# Altium PCB Smart_Car_Drv_V1.0.PcbDoc
Units mil, origin at the board's own origin, x right, y up, seen from the top; angles counter-clockwise.
Board outline 3921.26 x 2795.28 mil, 2 copper layers (Top Layer, Bottom Layer); 81 components, 42 nets, 246 pads, 83 vias.
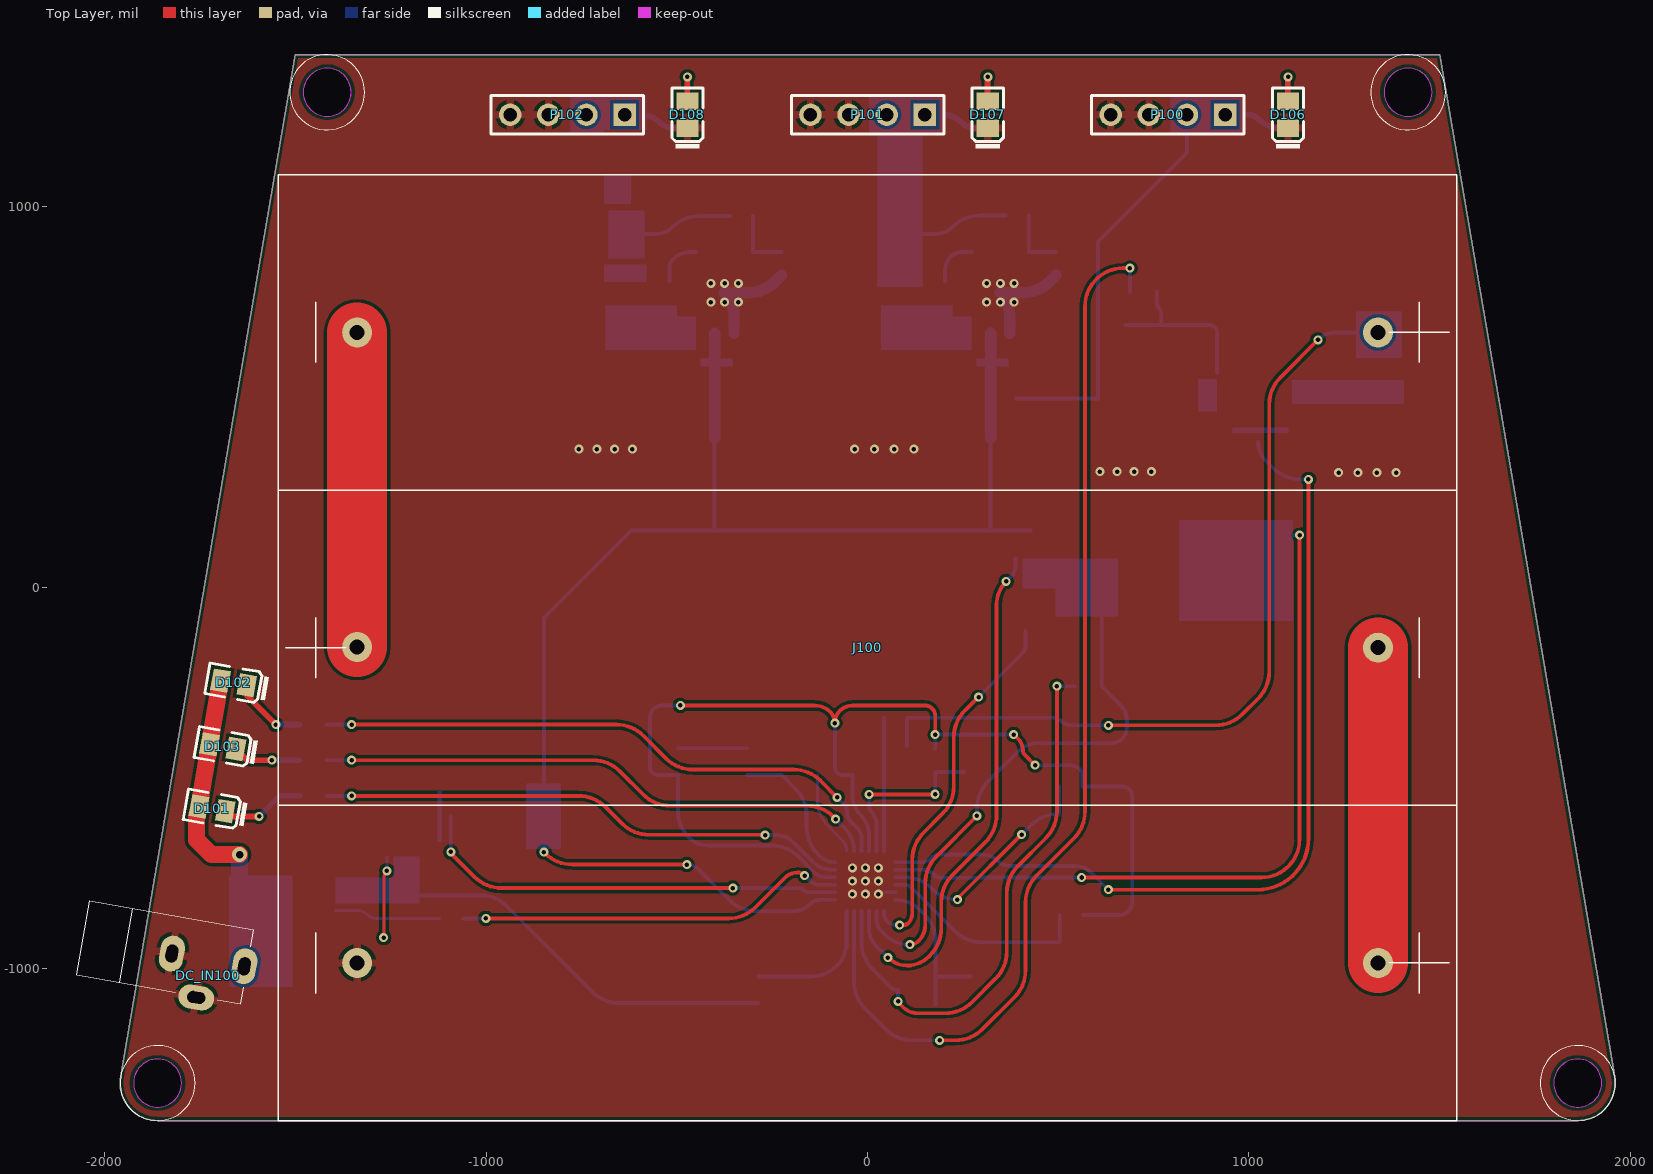
[diagram p0: Top Layer view]
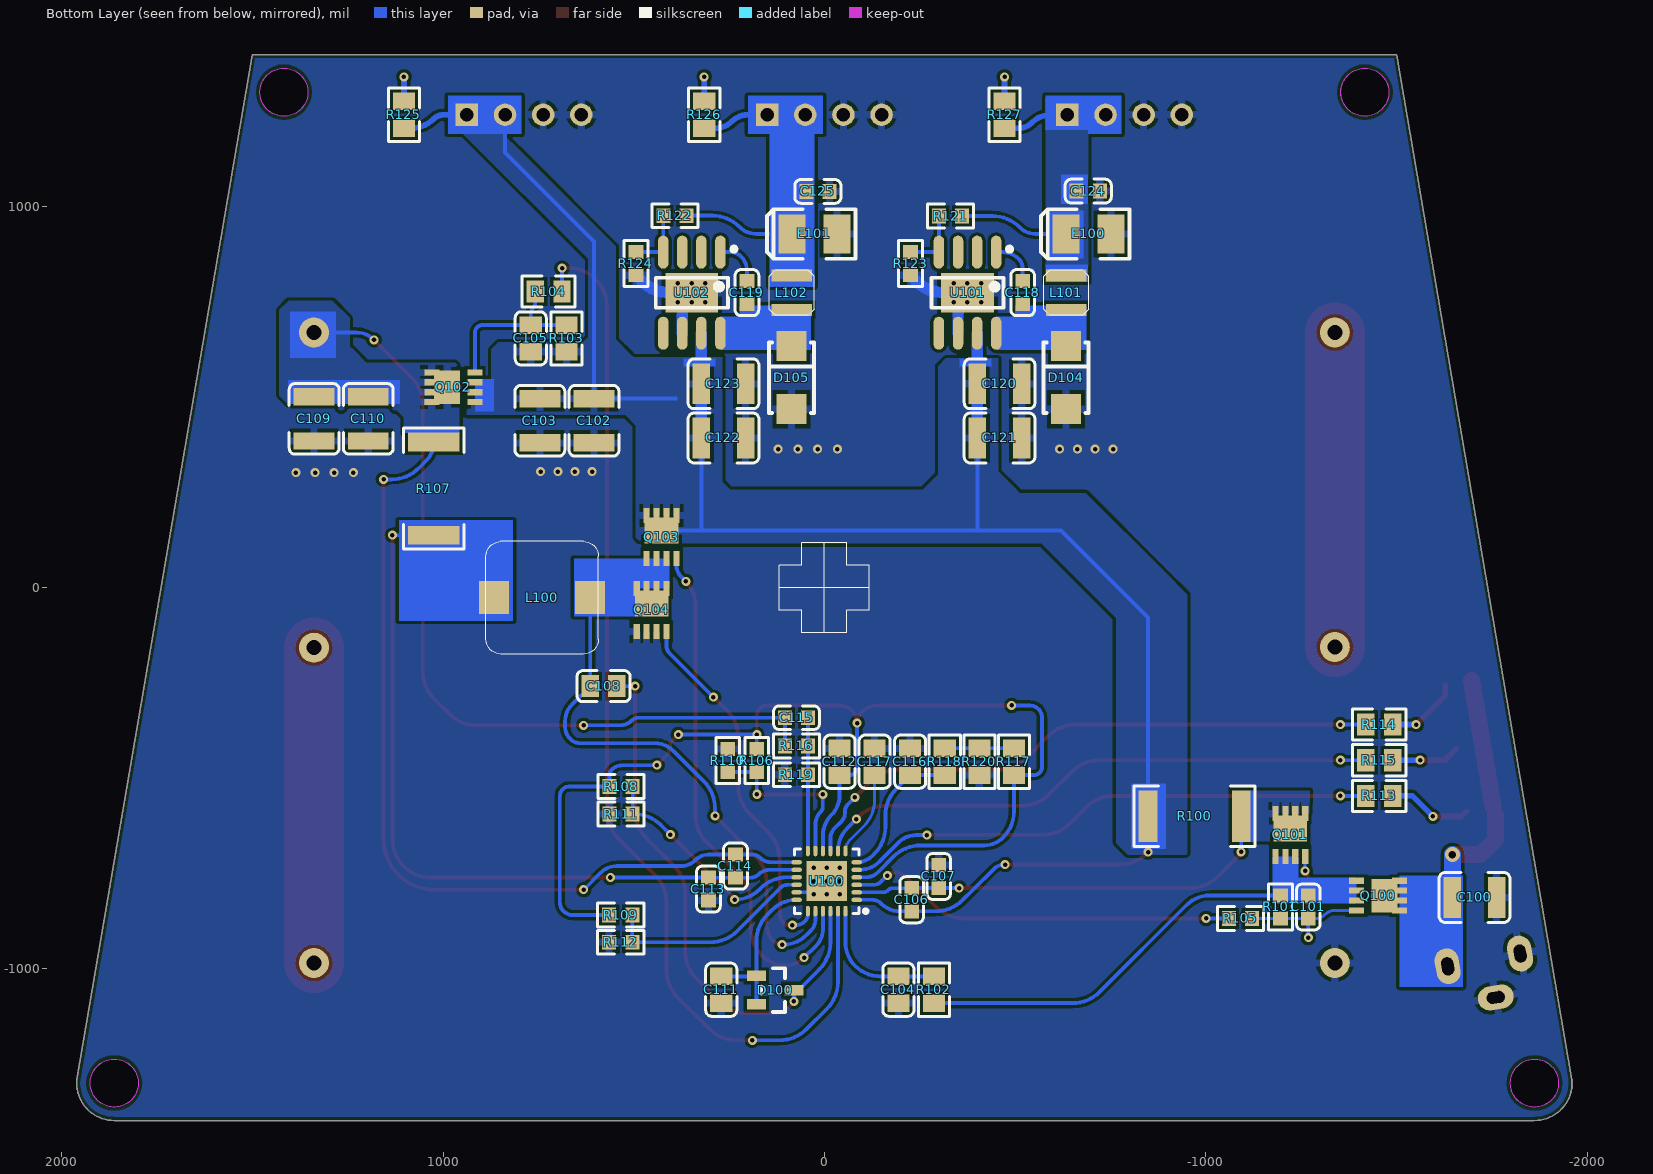
[diagram p1: Bottom Layer view, seen from below]
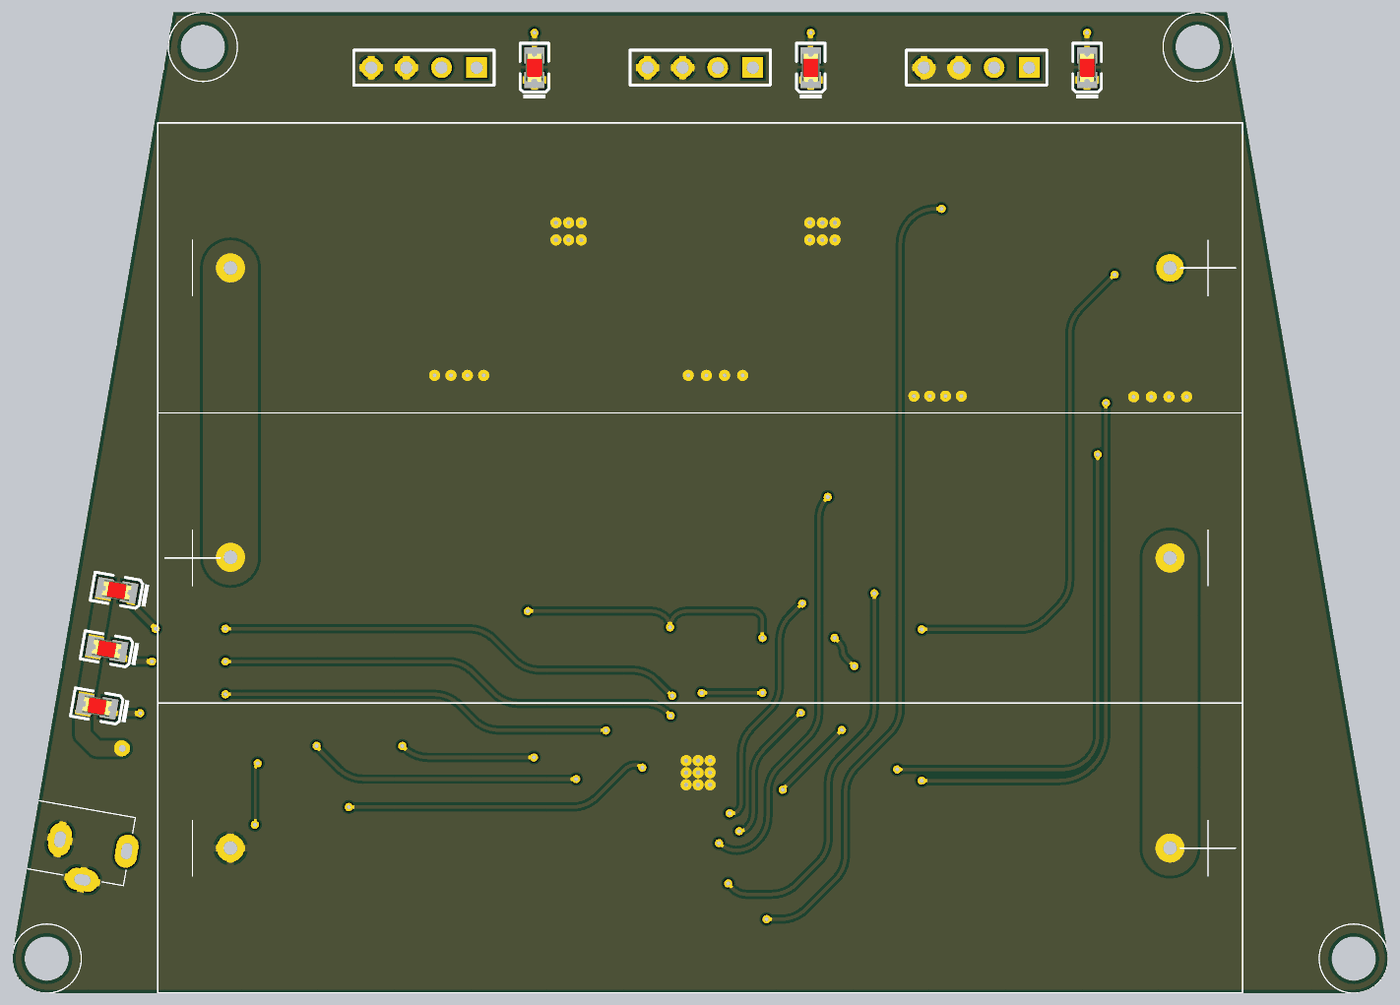
[diagram p2: 3D render of the assembled board from above, using the file's embedded part models]
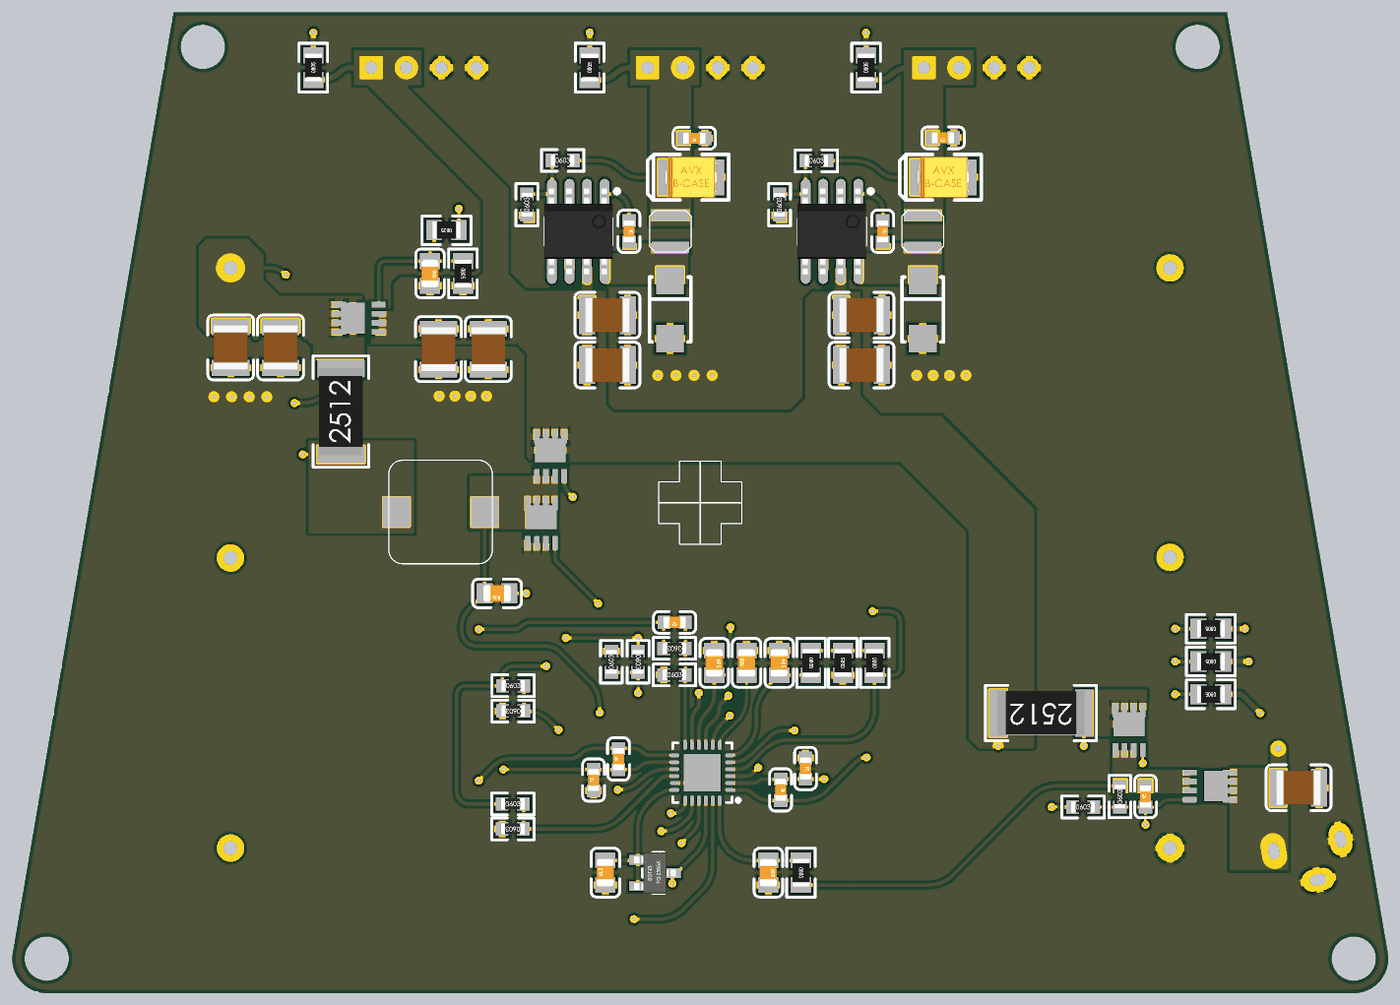
[diagram p3: 3D render of the assembled board from below, using the file's embedded part models]

## Layer stack, top to bottom
Top Solder: solder mask 0.4, Solder Resist, Dk 3.5
Top Layer: signal copper 1.4
Dielectric 1: dielectric 12.6, FR-4, Dk 4.8
Bottom Layer: signal copper 1.4
Bottom Solder: solder mask 0.4, Solder Resist, Dk 3.5

## Board outline
-1960.16,-1289.56 ccw(c-1862.2,-1299.21) -1862.2,-1397.64 1862.2,-1397.64 ccw(c1862.2,-1299.21) 1960.16,-1289.56 1960,-1289.58 1500.8,1397.62 1500.8,1397.64 -1500.97,1397.64 -1500.97,1397.63
cut-out: -1925.2,-1299.21 ccw(c-1862.2,-1299.21) -1862.2,-1362.2 ccw(c-1862.2,-1299.21) -1799.21,-1299.21 ccw(c-1862.2,-1299.21) -1862.2,-1236.22 ccw(c-1862.2,-1299.21)
cut-out: 1799.21,-1299.21 ccw(c1862.2,-1299.21) 1862.2,-1362.2 ccw(c1862.2,-1299.21) 1925.2,-1299.21 ccw(c1862.2,-1299.21) 1862.2,-1236.22 ccw(c1862.2,-1299.21)
cut-out: 1354.33,1299.21 ccw(c1417.32,1299.21) 1417.32,1236.22 ccw(c1417.32,1299.21) 1480.31,1299.21 ccw(c1417.32,1299.21) 1417.32,1362.2 ccw(c1417.32,1299.21)
cut-out: -1480.31,1299.21 ccw(c-1417.32,1299.21) -1417.32,1236.22 ccw(c-1417.32,1299.21) -1354.33,1299.21 ccw(c-1417.32,1299.21) -1417.32,1362.2 ccw(c-1417.32,1299.21)

## Design rules (kind name [scope] priority, off if disabled: settings)
Clearance GND [InNet('GND')] p1: gap=8
Clearance DVDD_3V3 [InNet('DVDD_3V3')] p2: gap=6
Clearance [All] p3: gap=6
ComponentClearance [All] p1: gap=0 collisioncheckmode=3 verticalgap=0 showdistances=FALSE
DiffPairsRouting [All] p1: maxlimit=10 minlimit=6 mostfreqgap=6 toplayer_minwidth=6 toplayer_maxwidth=15 toplayer_prefwidth=10 bottomlayer_minwidth=6 bottomlayer_maxwidth=15 bottomlayer_prefwidth=10 maxuncoupledlength=500
HoleSize [All] p1: absolutevalues=TRUE maxlimit=1000 minlimit=1 maxpercent=80.000 minpercent=20.000
HoleToHoleClearance [All] p1: gap=8 allowstackedmicrovias=TRUE
MinimumSolderMaskSliver [All] p1: minsoldermaskwidth=0
PlaneConnect [All] p1: planeconnectstyle=Relief reliefexpansion=20 reliefentries=4 reliefconductorwidth=15 reliefairgap=10
PolygonConnect via [Isvia] p1: connectstyle=Direct reliefconductorwidth=10 reliefentries=4 polygonreliefangle="90 Angle" airgapwidth=10
PolygonConnect [All] p2: connectstyle=Relief reliefconductorwidth=20 reliefentries=4 polygonreliefangle="90 Angle" airgapwidth=10
RoutingVias [All] p1: holewidth=12 width=25 viastyle="Through Hole" minholewidth=1 minwidth=1 maxholewidth=100 maxwidth=100
SilkToSilkClearance [All] p1: silktosilkclearance=0
SilkToSolderMaskClearance [IsPad] p1: minsilkscreentomaskgap=0 clearancetoexposedcopper=TRUE
SolderMaskExpansion [All] p1: expansion=4
Width [All] p1: maxlimit=100 minlimit=8 preferedwidth=8
22 further rules are at their usual default settings.

## Components (designator, comment, footprint, x,y, rotation, side; value= is the part's Value field where it differs from the comment)
C100 "1210-10uF-50V" 1210_C -1705,-812.38 r180 bottom
C101 "100nF (104) 10% 50V" 0603_C -1269,-837.38 r90 bottom
C102 "1210-10uF-50V" 1210_C 604,437.62 r270 bottom
C103 "1210-10uF-50V" 1210_C 746,437.62 r270 bottom
C104 "1uF (105) 10% 50V" 0805_C -194,-1054.38 r270 bottom
C105 "100nF(104) 10% 50V" 0805_C 770,653.62 r270 bottom
C106 "100nF (104) 10% 50V" 0603_C -229,-818.38 r270 bottom
C107 "100nF (104) 10% 50V" 0603_C -300,-757.38 r270 bottom
C108 "100nF(104) 10% 50V" 0805_C 579,-258.38 r0 bottom
C109 "1210-10uF-50V" 1210_C 1338,442.62 r270 bottom
C110 "1210-10uF-50V" 1210_C 1196,442.62 r270 bottom
C111 "1uF (105) 10% 50V" 0805_C 270.35,-1054.38 r90 bottom
C112 "1uF (105) 10% 50V" 0805_C -40,-456.38 r270 bottom
C113 "100nF (104) 10% 50V" 0603_C 304,-790.38 r90 bottom
C114 "100nF (104) 10% 50V" 0603_C 233,-730.38 r90 bottom
C115 "22pF (220) 5% 50V" 0603_C 73,-341 r0 bottom
C116 "100nF(104) 10% 50V" 0805_C -225,-456.38 r270 bottom
C117 "0805-56nF-50V" 0805_C -132,-456.38 r90 bottom
C118 "10nF (103) 10% 50V" 0603_C -520,773.62 r270 bottom
C119 "10nF (103) 10% 50V" 0603_C 203,773.62 r270 bottom
C120 "1210-10uF-50V" 1210_C -459.5,534.55 r180 bottom
C121 "1210-10uF-50V" 1210_C -459.5,392.55 r180 bottom
C122 "1210-10uF-50V" 1210_C 264.5,392.55 r180 bottom
C123 "1210-10uF-50V" 1210_C 264.5,534.55 r180 bottom
C124 "100nF (104) 10% 50V" 0603_C -692,1040 r0 bottom
C125 "100nF (104) 10% 50V" 0603_C 17,1039 r0 bottom
D100 "BAV70 A4" SOT-23(SOT-23-3) 129,-1055.38 r0 bottom
D101 "红灯 0805" 0805_LED_S1 -1719.07,-579.89 r170 top
D102 "翠绿 0805" 0805_LED_S1 -1662.68,-249.89 r170 top
D103 "蓝灯 0805" 0805_LED_S1 -1691.22,-416.89 r170 top
D104 "SS3200" SMA(DO-214AC)_S1 -634,550.62 r270 bottom
D105 "SS3200" SMA(DO-214AC)_S1 86,550.62 r270 bottom
D106 "红灯 0805" 0805_LED_S1 1102.36,1240.16 r90 top
D107 "红灯 0805" 0805_LED_S1 314.96,1240.16 r90 top
D108 "红灯 0805" 0805_LED_S1 -472.44,1240.16 r90 top
DC_IN100 "POWER" DC002 -1634.48,-993.01 r350 top locked
E100 "3528-100uF-16V" ES_3528 -693,927.62 r180 bottom
E101 "3528-100uF-16V" ES_3528 26,927.62 r180 bottom
J100 "18650X3" 18650X3 0,-157.48 r90 top locked
L100 "SMDRI74 6.8uH" "L 7.5*7.5*4.5" 740,-26.38 r0 bottom
L101 "SWPA3015S220MT  22uH" "L 3.0*3.0*1.5" -634,773.62 r90 bottom
L102 "SWPA3015S220MT  22uH" "L 3.0*3.0*1.5" 85,773.62 r90 bottom
P100 "BAT_OUT" HDR1X4 937.4,1240.16 r180 top locked
P101 "5V_OUT" HDR1X4 150,1240.16 r180 top locked
P102 "3.3V_OUT" HDR1X4 -637.4,1240.16 r180 top locked
Q100 "SI7617DN" PAK-1212-8 -1452,-807.38 r180 bottom
Q101 "SI7617DN" PAK-1212-8 -1222,-648.38 r90 bottom
Q102 "SI7617DN" PAK-1212-8 973,525.62 r0 bottom
Q103 "SIS412DN" PAK-1212-8 427,132.62 r90 bottom
Q104 "SIS412DN" PAK-1212-8 453,-58.38 r90 bottom
R100 "2512-0.01Ω-1%" 2512_R -971,-599.38 r0 bottom
R101 "100KΩ (1003) ±1%" 0603_R -1196,-837.37 r90 bottom
R102 "10Ω (10R0) ±1%" 0805_R -287,-1054.38 r270 bottom
R103 "100KΩ (1003) ±1%" 0805_R 676,653.62 r270 bottom
R104 "1KΩ (1001) ±1%" 0805_R 723,776.62 r0 bottom
R105 "1KΩ (1001) ±1%" 0603_R -1091,-867.37 r180 bottom
R106 "100KΩ (1003) ±1%" 0603_R 177.25,-453.38 r270 bottom
R107 "2512-0.01Ω-1%" 2512_R 1024,259.62 r90 bottom
R108 "100KΩ (1003) ±1%" 0603_R 533,-521.63 r180 bottom
R109 "100KΩ (1003) ±1%" 0603_R 534,-858.63 r180 bottom
R110 "0603-22.1K-1%" 0603_R 253.25,-453.38 r90 bottom
R111 "0603-10K-1%" 0603_R 533,-593.63 r0 bottom
R112 "0603-32.4K-1%" 0603_R 534,-929.63 r0 bottom
R113 "10KΩ (1002) ±1%" 0805_R -1455,-546 r0 bottom
R114 "10KΩ (1002) ±1%" 0805_R -1455,-359 r0 bottom
R115 "10KΩ (1002) ±1%" 0805_R -1455,-452.5 r0 bottom
R116 "0603-500K-1%" 0603_R 73.46,-415.13 r0 bottom
R117 "10KΩ (1002) ±1%" 0805_R -497,-456.38 r90 bottom
R118 "100Ω (1000) ±1%" 0805_R -315.67,-456.38 r270 bottom
R119 "100KΩ (1003) ±1%" 0603_R 73.46,-490.63 r180 bottom
R120 "100KΩ (1003) ±1%" 0805_R -406.33,-456.38 r90 bottom
R121 "10KΩ (1002) ±1%" 0603_R -331,974.62 r180 bottom
R122 "10KΩ (1002) ±1%" 0603_R 392,975.62 r180 bottom
R123 "0603-5.76K-1%" 0603_R -226,849.62 r90 bottom
R124 "0603-3.24K-1%" 0603_R 494,849.62 r90 bottom
R125 "10KΩ (1002) ±1%" 0805_R 1102.36,1240.16 r90 bottom
R126 "1KΩ (1001) ±1%" 0805_R 314.96,1240.16 r90 bottom
R127 "1KΩ (1001) ±1%" 0805_R -472.44,1240.16 r90 bottom
U100 "BQ24610" QFN-24_4x4x05P -6,-769.38 r90 bottom
U101 "TPS5430DDAR" "SOP-8_150mil DCDC" -375.5,773.55 r0 bottom
U102 "TPS5430DDAR" "SOP-8_150mil DCDC" 347.5,773.55 r0 bottom

## Footprints (in the part's own frame and the unit in brackets; to place one, negate y for a bottom-side part, rotate by r counter-clockwise, add the part's x,y. Pads: shape width x height; smd on the part's side, far side on the other; paste and mask are expansions set on the pad)
0603_C [mm]
  rect 0.93x0.98 smd: 1(-0.77,0) 2(0.77,0)
  silkscreen extent -1.53,-0.79 1.54,0.79, body extent -0.8,-0.4 0.8,0.4, height 0.3
0603_R [mm]
  rect 0.93x0.98 smd: 1(-0.77,0) 2(0.77,0)
  silkscreen extent -1.53,-0.79 1.54,0.79, body extent -0.85,-0.4 0.85,0.4, height 0.56
0805_C [mm]
  rect 1.16x1.47 smd: 1(-0.89,0) 2(0.89,0)
  silkscreen extent -1.77,-1.04 1.77,1.04, body extent -1,-0.63 1,0.62, height 0.77
0805_LED_S1 [mm]
  rect 1.16x1.47 smd: A(0.89,0) K(-0.89,0)
  silkscreen extent -2.25,-1.04 1.77,1.03, body extent -1.01,-0.63 1.01,0.62, height 1.1
0805_R [mm]
  rect 1.16x1.47 smd: 1(-0.89,0) 2(0.89,0)
  silkscreen extent -1.77,-1.04 1.77,1.03, body extent -1,-0.63 1,0.62, height 0.49
1210_C [mm]
  rect 1.16x2.72 smd: 1(-1.475,0) 2(1.475,0)
  silkscreen extent -2.36,-1.66 2.35,1.66, body extent -1.6,-1.25 1.6,1.25, height 1.3
2512_R [mm]
  rect 1.25x3.42 smd: 1(-3.1,0) 2(3.1,0)
  silkscreen extent -4.03,-2.01 4.02,2.01, body extent -3.16,-1.6 3.16,1.6, height 0.62
18650X3 [mm]
  round 2 hole 1 mask+0.05: 1(-21,34) 2(-21,-34) 3(0,-34) 4(0.047,34) 5(21,34) 6(21,-34)
  Top Layer lines w4: 0.047,34 21,34 ; -21,-34 0,-34
  silkscreen extent -31.5,-39.25 31.5,39.25
DC002 [mm]
  oval 1.6x2.4 hole 0.8 slot 1.2 at 90 deg: 1(0,0) 2(-4.9,0)
  oval 2.4x1.6 hole 0.8 slot 1.2 at 0 deg: 3(-2.8,-2.6)
  silkscreen extent -10.9,-2.5 0.2,2.5
ES_3528 [mm]
  rect 1.8x2.6 smd: 1(-1.5,0) 2(1.5,0)
  silkscreen extent -3.16,-1.65 2.73,1.65, body extent -1.85,-1.47 1.85,1.46, height 2.03
HDR1X4 [mm] "Connector; Header; 4 Position"
  rect 1.5x1.5 hole 0.9: 1(0,0)
  round 1.5 hole 0.9: 2(2.54,0) 3(5.08,0) 4(7.62,0)
  silkscreen extent -1.27,-1.27 8.89,1.27
"L 3.0*3.0*1.5" [mm]
  rect 0.8x2.7 smd mask+0.05: 1(-1.15,0) 2(1.15,0)
  silkscreen extent -1.5,-1.5 1.5,1.5
"L 7.5*7.5*4.5" [mm]
  rect 2x2.2 smd mask+0.05: 1(-3.2,0) 2(3.2,0)
  silkscreen extent -3.75,-3.75 3.75,3.75
PAK-1212-8 [mm]
  rect 1x0.41 smd mask+0.05: 1(-1.435,-0.99) 2(-1.435,-0.33) 2(-1.435,0.33) 2(-1.435,0.99) 3(1.435,-0.99) 3(1.435,-0.33) 3(1.435,0.33) 3(1.435,0.99)
  rect 1.725x2.235 smd mask+0.05: 3(0.432,0)
QFN-24_4x4x05P [mm]
  rect 2.68x2.68 smd mask+0.051: 0(0,0)
  oval 0.28x0.7 smd mask+0.051: 1(-1.25,-2) 2(-0.75,-2) 3(-0.25,-2) 4(0.25,-2) 5(0.75,-2) 6(1.25,-2) 13(1.25,2) 14(0.75,2) 15(0.25,2) 16(-0.25,2) 17(-0.75,2) 18(-1.25,2)
  oval 0.7x0.28 smd mask+0.051: 7(2,-1.25) 8(2,-0.75) 9(2,-0.25) 10(2,0.25) 11(2,0.75) 12(2,1.25) 19(-2,1.25) 20(-2,0.75) 21(-2,0.25) 22(-2,-0.25) 23(-2,-0.75) 24(-2,-1.25)
  silkscreen extent -2.15,-2.72 2.15,2.15
SMA(DO-214AC)_S1 [mm]
  rect 2x2 smd: 1(2.1,0) 2(-2.1,0)
  silkscreen extent -2.35,-1.5 2.35,1.5
"SOP-8_150mil DCDC" [mm]
  rect 3.51x2.62 smd mask+0.05: 0(0,0)
  oval 0.7x2.2 smd: 1(-1.905,-2.7) 2(-0.635,-2.7) 3(0.635,-2.7) 4(1.905,-2.7) 5(1.905,2.7) 6(0.635,2.7) 7(-0.635,2.7) 8(-1.905,2.7)
  silkscreen extent -2.95,-3.05 2.4,1, body extent -2.5,-3.1 2.5,3.1, height 1.75
SOT-23(SOT-23-3) [mm]
  rect 1.25x0.7 smd: 1(1.25,-0.95) 2(1.25,0.95) 3(-1.25,0)
  silkscreen extent -0.65,-1.46 0.9,1.46, body extent -1.5,-1.5 1.5,1.5, height 1.3

## Part data
C100 C102 C103 C109 C110 C120 C121 C122 C123: library part "1210 10uF (106) 10% 50V", "贴片电容"
C101 C106 C107 C113 C114 C124 C125: library part "0603 100nF (104) 10% 50V", "贴片电容"
C104 C111 C112: library part "0805 1uF (105) 10% 50V", "贴片电容"
C105 C108 C116: library part "0805 100nF(104) 10% 50V", "贴片电容"
C115: library part "0603 22pF (220) 5% 50V", "贴片电容"
C117: library part "0805 100nF (104) 10% 50V", "贴片电容"
C118 C119: library part "0603 10nF (103) 10% 50V", "贴片电容"
D100: library part "SOT-23 BAV70 A4", "开关二极管"
D101 D106 D107 D108: library part "0805 红灯", "发光二极管"
D102: library part "0805 翠绿", "发光二极管"
D103: library part "0805 蓝灯", "发光二极管"
D104 D105: library part "SMA(DO-214AC) M7", "二极管"
DC_IN100: library part PWR
E100 E101: library part ES-3528, "贴片钽电容"
J100: "BAT_BASE"
L100 L101 L102: library part "10uH 20%", "贴片电感"
P100 P101 P102: library part "Header 4", "Header, 4-Pin"
Q100 Q101 Q102: "P-MOS"
Q103 Q104: "N-MOS"
R100 R107: library part "2512 10KΩ (103) 1%", "贴片电阻"
R101 R106 R108 R109 R119: library part "0603 100KΩ (1003) 1%", "贴片电阻"
R102: library part "0805 10Ω (10R0) 1%", "贴片电阻"
R103 R120: library part "0805 100KΩ (1003) 1%", "贴片电阻"
R104 R126 R127: library part "0805 1KΩ (1001) 1%", "贴片电阻"
R105: library part "0603 1KΩ (1001) 1%", "贴片电阻"
R110 R111 R112 R116 R123 R124: library part "0603 10KΩ (103) 1%", "贴片电阻"
R113 R114 R115 R117 R125: library part "0805 10KΩ (1002) 1%", "贴片电阻"
R118: library part "0805 100Ω (1000) 1%", "贴片电阻"
R121 R122: library part "0603 10KΩ (1002) 1%", "贴片电阻"
U100: "Charg IC"
U101 U102: "DC-DCоƬ"

## Via types
v1: diameter 23.62, hole 11.81, Top Layer to Bottom Layer, 82 vias
v2: diameter 39.37, hole 19.68, Top Layer to Bottom Layer, 1 vias

## Nets (pads, with @x,y where several pads share a name; then routed paths per layer and width w, separated by ;. In a path a pad name is that pad's centre, name@x,y a point inside that pad or via, vN(x,y) a via of type N, cw(c..) or ccw(c..) an arc to the next point about the centre after c; other vN are vias at no path point)
DVDD_3V3: C124.2 E100.1 L101.2 P102.1 P102.2 R121.2 R127.1 | length 459.5
  Bottom Layer w10: E100.1 -554.42,927.62 ccw(c-554.42,988.09) -511.67,945.33 cw(c-440.96,874.62) -440.96,974.62 R121.2
  Bottom Layer w15: P102.1 -593.66,1240.16 cw(c-593.66,1171.34) -545,1220 ccw(c-509.07,1255.93) -509.07,1205.12 R127.1
DVDD_5V: C125.2 E101.1 L102.2 P101.1 P101.2 R122.2 R126.1 | length 463.8
  Bottom Layer w10: E101.1 177.22,927.62 ccw(c177.22,993.78) 224,947 cw(c293.1,877.9) 293.1,975.62 R122.2
  Bottom Layer w15: P101.1 200.58,1240.16 cw(c200.58,1181.58) 242,1223 ccw(c285.17,1266.17) 285.17,1205.12 R126.1
DVDD_24V: C100.1 D101.A D102.A D103.A DC_IN100.1 Q100.3 | length 639.3
  Top Layer w45: D101.A@-1760,-598 -1760,-661 -1720.93,-700.07 v2(-1646.93,-700.07) ; D101.A D103.A D102.A
  Bottom Layer w45: C100.1 v2(-1646.93,-700.07)
GND: C100.2 C102.2 C103.2 C104.2 C107.1 C109.2 C110.2 C111.1 C112.1 C113.1 C116.1 C117.2 C120.2 C121.2 C122.2 C123.2 C124.1 C125.1 D104.1 D105.1 D106.K D107.K D108.K DC_IN100.2 DC_IN100.3 E100.2 E101.2 J100.1 P100.3 P100.4 P101.3 P101.4 P102.3 P102.4 Q104.2 R110.2 R111.2 R112.2 R119.1 R120.1 R123.1 R124.1 U100.0 U100.17 U101.0 U101.6 U102.0 U102.6 | length 579
  Bottom Layer w10: U100.0@45,-798.91 U100.17
  Bottom Layer w30: U101.6 -350.5,713.2 ccw(c-435.86,713.2) U101.0 -313.18,773.55 ccw(c-313.18,873.55) -242.47,802.84 R123.1 ; U102.6 372.5,713.2 ccw(c287.14,713.2) U102.0 406.82,773.55 ccw(c406.82,873.55) 477.53,802.84 R124.1
  other v1: -40,-803.88 -6,-803.88 28,-803.88 -40,-769.38 -6,-769.38 28,-769.38 -40,-734.88 -6,-734.88 28,-734.88 1235,302 1285.33,302 1335.67,302 1386,302 609,304 654,304 699,304 744,304 -757,363 -710.33,363 -663.67,363 -617,363 -34,363 17.67,363 69.33,363 121,363 -411,749 -375,749 -339,749 312,749 348,749 384,749 -411,798 -375,798 -339,798 312,798 348,798 384,798
NetC101_1: C101.1 Q100.1 Q101.1 R101.1 R105.2 | length 549.1
  Top Layer w8: v1(-1269,-917.59) ccw(c-1265.59,-917.59) -1268,-920 -1268,-759.28 cw(c-1244.1,-759.28) v1(-1261,-742.38)
  Bottom Layer w8: Q100.1 -1338.7,-846.35 cw(c-1338.7,-882.7) -1313,-857 ccw(c-1287.18,-831.18) -1287.18,-867.69 C101.1 ; v1(-1269,-917.59) C101.1 ; v1@-1260.98,-742.35 Q101.1 ; R105.2@-1121.63,-867.69 C101.1
NetC101_2: C101.2 Q100.2 Q101.2 R101.2 R102.2 | length 1017.8
  Bottom Layer w10: R101.2 -1011.63,-807.06 cw(c-1011.63,-895.63) -949,-833 -721.87,-1060.13 ccw(c-651.16,-989.42) -651.16,-1089.42 R102.2
NetC104_1: C104.1 R102.1 U100.24 | length 364.1
  Bottom Layer w10: R102.1 C104.1 -147,-1019.34 ccw(c-147,-926) -81,-992 ccw(c-143.26,-929.74) -55.21,-929.74 U100.24
NetC105_1: C105.1 Q102.1 R103.1 R104.2 | length 447.1
  Bottom Layer w10: R103.1 C105.1 ; R104.2 758.04,747.05 ccw(c776.1,747.05) 763.33,734.28 cw(c747.22,718.18) 767.45,728.65 cw(c747.22,718.18) 770,718.18 C105.1 ; Q102.1 916.5,668.5 ccw(c896.34,668.5) 896.34,688.66 C105.1
NetC106_1: C106.1 C107.2 Q101.3 R100.1 U100.2 | length 1140.8
  Top Layer w10: v1(-1093.05,-693.06) ccw(c-1086.06,-693.06) -1091,-698 -1030.6,-758.4 ccw(c-959.89,-687.69) -959.89,-787.69 v1(-353.69,-787.69)
  Bottom Layer w10: v1(-1093.05,-693.06) R100.1 ; v1(-353.69,-787.69) C107.2 C106.1@-229.37,-787.69 ; C106.1 -178.5,-788.06 cw(c-178.5,-801.5) -169,-792 ccw(c-152.33,-775.33) -152.33,-798.91 U100.2
NetC108_1: C108.1 D100.3 U100.22 | length 1447.1
  Top Layer w10: v1(79.79,-1085.07) ccw(c83.93,-1085.07) 81,-1088 93.45,-1100.45 ccw(c131,-1062.89) 131,-1116 203.58,-1116 ccw(c203.58,-1016) 274.29,-1086.71 335.71,-1025.29 ccw(c265,-954.58) 365,-954.58 365,-800.42 cw(c465,-800.42) 394.29,-729.71 466.87,-657.13 ccw(c396.16,-586.42) 496.16,-586.42 v1(496.16,-258.38)
  Bottom Layer w10: U100.22 -15.84,-930.74 ccw(c84.16,-930.74) 13.45,-1001.45 58.6,-1046.6 ccw(c79.79,-1025.42) D100.3 v1(79.79,-1085.07) ; v1(496.16,-258.38) C108.1
NetC108_2: C108.2 L100.1 Q103.2 Q104.3 U100.20 | length 1442.4
  Top Layer w10: v1(111,-936) ccw(c111,-904.62) 133.19,-926.81 ccw(c90.2,-883.82) 151,-883.82 151,-775.42 cw(c251,-775.42) 180.29,-704.71 v1(286.71,-598.29)
  Bottom Layer w10: U100.20 23.53,-871.3 ccw(c62.7,-871.3) 35,-899 47.25,-911.25 ccw(c107,-851.5) 107,-936 v1(111,-936) ; v1(286.71,-598.29) 286.71,-578.71 cw(c386.71,-578.71) 316,-508 396,-428 cw(c444.28,-476.28) 444.28,-408 639.67,-408 ccw(c639.67,-370.37) 666.28,-396.98 ccw(c633.15,-363.85) 680,-363.85 680,-352 ccw(c613.22,-352) 660.44,-304.78 C108.2 cw(c583.66,-258.38) 614.02,-259.58 L100.1
NetC111_2: C111.2 D100.1 D100.2 U100.18 | length 424.4
  Bottom Layer w10: U100.18 73.24,-818.59 cw(c73.24,-908.76) 94.98,-821.25 cw(c73.24,-908.76) 137,-845 148.92,-856.92 cw(c78.21,-927.63) 178.21,-927.63 D100.1 ; D100.2 D100.1 ; C111.2 181.5,-1019.34 cw(c181.5,-1014.69) D100.1
NetC113_2: C113.2 C114.1 L100.2 R107.1 U100.14 | length 2031.1
  Top Layer w10: v1(561,-760.06) 1032.57,-760.06 ccw(c1032.57,-660.06) 1132.57,-660.06 v1(1132.57,137.57) ccw(c1132.57,139) v1@1134,139
  Bottom Layer w10: U100.14 142.25,-739.85 cw(c142.25,-784.75) 174,-753 ccw(c192.57,-734.43) 192.57,-760.69 C114.1 302.48,-760.69 ccw(c302.48,-758.54) C113.2 v1(561,-760.06) ; R107.1 v1(1132.57,137.57)
NetC115_1: C115.1 R116.1 R119.2 U100.12 | length 349.8
  Bottom Layer w10: C115.1 42.69,-489.51 ccw(c44.27,-489.51) R119.2 43.15,-690.57 U100.12
NetC116_2: C116.2 R118.2 U100.6 | length 380.5
  Bottom Layer w10: R118.2 C116.2 -189.29,-527.13 cw(c-260,-597.84) -160,-597.84 -160,-627.58 ccw(c-60,-627.58) -130.71,-698.29 -125.87,-703.13 ccw(c-84.74,-662) U100.6
NetC117_1: C117.1 U100.7 | length 225
  Bottom Layer w8: C117.1 -132,-555.58 ccw(c-32,-555.58) -102.71,-626.29 -67.13,-661.87 cw(c-95.89,-690.64) U100.7
NetC118_1: C118.1 U101.1 | length 125
  Bottom Layer w10: C118.1 -520,837.86 cw(c-485.86,837.86) -510,862 cw(c-466.91,818.91) -466.91,879.85 U101.1
NetC118_2: C118.2 D104.2 L101.1 U101.8
NetC119_1: C119.1 U102.1 | length 125.7
  Bottom Layer w10: C119.1 203,831.79 cw(c254.21,831.79) 218,868 cw(c246.61,839.39) 246.61,879.85 U102.1
NetC119_2: C119.2 D105.2 L102.1 U102.8
NetD101_K: D101.K R113.1 | length 222.7
  Top Layer w15: D101.K -1670.54,-600 v1(-1596,-600)
  Bottom Layer w15: v1(-1596,-600) -1542,-546 R113.1
NetD102_K: D102.K R114.1 | length 196.5
  Top Layer w15: D102.K -1628.18,-282.82 v1(-1552,-359)
  Bottom Layer w15: v1(-1552,-359) R114.1
NetD103_K: D103.K R115.1 | length 178.9
  Top Layer w15: D103.K -1627.19,-452.5 v1(-1562.5,-452.5)
  Bottom Layer w15: v1(-1562.5,-452.5) R115.1
NetD106_A: D106.A R125.2 | length 128.9
  Top Layer w15: D106.A@1101.8,1276.55 v1@1101.8,1341
  Bottom Layer w15: R125.2 v1(1102.36,1339.65)
NetD107_A: D107.A R126.2 | length 128.9
  Top Layer w15: D107.A@314.4,1276.55 v1@314.4,1341
  Bottom Layer w15: R126.2 v1(314.96,1339.65)
NetD108_A: D108.A R127.2 | length 131.9
  Top Layer w15: D108.A cw(c-471.09,1276.55) -473,1276.55 -473,1341 cw(c-474.35,1339.65) v1(-472.44,1339.65)
  Bottom Layer w15: R127.2 v1(-472.44,1339.65)
NetQ103_1: Q103.1 U100.21 | length 1378.4
  Top Layer w10: v1(53.29,-970.29) ccw(c55,-968.59) 55,-971 ccw(c103.28,-922.72) 103.28,-991 ccw(c103.28,-909.6) 160.84,-967.16 163.71,-964.29 ccw(c93,-893.58) 193,-893.58 193,-824.42 cw(c293,-824.42) 222.29,-753.71 308.71,-667.29 ccw(c238,-596.58) 338,-596.58 338,-44.94 cw(c424.77,-44.94) 353.35,4.34 cw(c424.77,-44.94) v1(363.41,16.41)
  Bottom Layer w10: U100.21 3.84,-896.58 ccw(c62.42,-896.58) 21,-938 v1(53.29,-970.29) ; v1(363.41,16.41) 375,28 ccw(c343.56,59.44) 388.02,59.44 Q103.1
NetQ104_1: Q104.1 U100.19 | length 983.6
  Top Layer w10: v1(83.59,-885) v1@88.86,-885 ; v1(290.71,-287.29) cw(c289,-285.59) 289,-288 255.29,-321.71 ccw(c326,-392.42) 226,-392.42 226,-521.58 cw(c126,-521.58) 196.71,-592.29 146.29,-642.71 ccw(c217,-713.42) 117,-713.42 117,-853.71 cw(c79.22,-853.71) 105.93,-880.42 ; v1@88.86,-885 ccw(c88.86,-850.86) 105.93,-880.42 ; v1@88.86,-885 94.88,-885 ccw(c94.88,-869.37) 105.93,-880.42
  Bottom Layer w10: U100.19 43.21,-856.2 ccw(c69.8,-856.2) 51,-875 ccw(c75.14,-850.86) 75.14,-885 v1(83.59,-885) ; v1(290.71,-287.29) 406,-172 ccw(c386.63,-152.63) 414.02,-152.63 Q104.1
NetR104_1: R104.1 U100.23 | length 2840
  Top Layer w10: v1(189,-1187) 230.58,-1187 ccw(c230.58,-1087) 301.29,-1157.71 384.71,-1074.29 ccw(c314,-1003.58) 414,-1003.58 414,-825.42 cw(c514,-825.42) 443.29,-754.71 540.71,-657.29 ccw(c470,-586.58) 570,-586.58 570,737.96 cw(c670,737.96) 670,837.96 v1(687.96,837.96)
  Bottom Layer w10: U100.23 -35.53,-1034.05 ccw(c64.47,-1034.05) -6.24,-1104.76 46.71,-1157.71 ccw(c117.42,-1087) 117.42,-1187 v1(189,-1187) ; R104.1 v1(687.96,837.96)
NetR105_1: R105.1 U100.3 | length 1030.6
  Top Layer w10: v1(-1001.37,-867.37) -364.8,-867.37 ccw(c-364.8,-767.37) -294.09,-838.09 -216,-760 cw(c-184.62,-791.38) -184.62,-747 -184.24,-747 cw(c-184.24,-772.5) -166.21,-754.47 cw(c-166.21,-756.1) v1(-165.05,-754.95)
  Bottom Layer w10: R105.1 v1(-1001.37,-867.37) ; v1(-165.05,-754.95) -149,-771 ccw(c-129.15,-751.15) -129.15,-779.22 U100.3
NetR106_2: R106.2 R110.1 U100.11 | length 461.3
  Top Layer w10: v1(4,-542) 177,-542 v1(177.25,-541.75)
  Bottom Layer w10: v1(4,-542) 4,-574.93 ccw(c21.07,-574.93) 9,-587 cw(c-26.07,-622.07) 23.53,-622.07 U100.11 ; v1(177.25,-541.75) R106.2 R110.1
NetR108_2: R108.2 R111.1 U100.15 | length 607.5
  Top Layer w10: v1(235,-818) cw(c239.83,-818) 236.41,-814.59 v1(403.46,-647.54)
  Bottom Layer w10: U100.15 97.11,-759.54 cw(c97.11,-859.54) 167.82,-788.82 170.13,-791.13 ccw(c235,-726.26) v1(235,-818) ; v1(403.46,-647.54) 428.08,-622.92 cw(c498.79,-693.63) 498.79,-593.63 R111.1 R108.2
NetR109_2: R109.2 R112.1 U100.16 | length 558.9
  Bottom Layer w10: U100.16 96.93,-779.22 cw(c96.93,-804.07) 114.48,-786.48 228.34,-900.34 ccw(c299.05,-829.63) 298.91,-929.63 ccw(c299.05,-829.63) 299.05,-929.63 R112.1 R109.2
NetR113_2: R113.2 U100.5 | length 1400.9
  Top Layer w10: v1(-1353.17,-546) -758.42,-546 cw(c-758.42,-646) -687.71,-575.29 -644.29,-618.71 ccw(c-573.58,-548) -573.58,-648 -271,-648 ccw(c-268.59,-645.59) v1(-268.59,-649)
  Bottom Layer w10: R113.2 v1(-1353.17,-546) ; v1(-268.59,-649) -240,-649 cw(c-240,-711.77) -195.62,-667.38 -145,-718 ccw(c-92.25,-665.25) -92.25,-739.85 U100.5
NetR114_2: R114.2 U100.9 | length 1569.5
  Top Layer w10: v1(-1353.17,-359) -658.83,-359 cw(c-658.83,-459) -588.12,-388.29 -528.7,-447.71 ccw(c-457.99,-377) -457.99,-477 -194.42,-477 cw(c-194.42,-577) -123.71,-506.29 v1(-80,-550)
  Bottom Layer w10: R114.2 v1(-1353.17,-359) ; v1(-80,-550) -59.99,-570.01 cw(c-63.23,-573.24) -58.65,-573.24 cw(c-69.89,-584.48) -54,-584.48 -54,-591 ccw(c-22.62,-591) -44.81,-613.19 -27,-631 cw(c-53.94,-657.94) -15.84,-657.94 U100.9
NetR115_2: R115.2 U100.8 | length 1487.6
  Top Layer w10: v1(-1353.17,-452.5) -719.92,-452.5 cw(c-719.92,-552.5) -649.21,-481.79 -588.29,-542.71 ccw(c-517.58,-472) -517.58,-572 -159.42,-572 cw(c-159.42,-672) -88.71,-601.29 -85,-605 ccw(c-82.59,-605) v1(-84.29,-606.71)
  Bottom Layer w10: R115.2 v1(-1353.17,-452.5) ; v1(-84.29,-606.71) -60.39,-630.61 cw(c-120.42,-690.64) U100.8
NetR117_2: R117.2 R118.1 R120.2 | length 181.3
  Bottom Layer w10: R117.2 R120.2 R118.1
NetR121_1: R121.1 R123.2 U101.4 | length 169.2
  Bottom Layer w10: R121.1 -300.69,880.04 R123.2@-226.1,880.04
NetR122_1: R122.1 R124.2 U102.4 | length 167.3
  Bottom Layer w10: R122.1 422.31,880.04 U102.4 R124.2@493.91,879.85
VBAT: C109.1 C110.1 C114.2 C115.2 J100.6 Q102.3 R107.2 R116.2 U100.13 | length 4505.7
  Top Layer w10: v1(631,-792) 1022.86,-792 ccw(c1022.86,-658.86) 1156,-658.86 v1(1156,284) ; v1(631,-361) 912.58,-361 ccw(c912.58,-261) 983.29,-331.71 1023.71,-291.29 ccw(c953,-220.58) 1053,-220.58 1053,480.58 cw(c1153,480.58) 1082.29,551.29 v1(1181,650)
  Bottom Layer w10: U100.13 139.63,-720.17 ccw(c139.63,-678.63) 169,-708 cw(c188.16,-727.16) 188.16,-700.06 C114.2 302.94,-700.06 cw(c302.94,-751.06) 339,-715 ccw(c375.21,-678.79) 375.21,-730 544,-730 cw(c544,-790.36) 586.68,-747.68 v1(631,-792) ; R116.2 cw(c104.9,-414.01) 103.32,-414.01 C115.2 486.69,-341 cw(c486.69,-368.31) 506,-349 ccw(c534.97,-320.03) 534.97,-361 v1(631,-361) ; R107.2 ccw(c1093.21,381.67) 1044.27,332.73 1063.71,313.29 ccw(c1134.42,384) 1134.42,284 v1(1156,284) ; v1(1181,650) cw(c1227.57,603.43) 1227.57,669.29 J100.6
VBAT_OUT: C102.1 C103.1 C105.2 C106.2 C120.1 C121.1 C122.1 C123.1 P100.1 P100.2 Q102.2 Q103.3 R100.2 R103.2 R125.1 U100.1 U101.7 U102.7 | length 5221.5
  Top Layer w10: v1@-847,-698 cw(c-842.29,-693.29) v1(-848.95,-693.29) -845.53,-696.71 ccw(c-774.82,-626) -774.82,-726 v1(-473.97,-726)
  Bottom Layer w10: v1(-848.95,-693.29) R100.2 -848.95,-78.95 -620.38,149.62 Q103.3@427,149.62 ; v1(-473.97,-726) cw(c-473.97,-769.38) -443.29,-738.71 -389.94,-792.06 -362.6,-819.4 ccw(c-291.89,-748.69) -291.89,-848.69 C106.2 -197.54,-848.69 ccw(c-197.54,-781.46) -150,-829 cw(c-124.87,-854.13) -124.87,-818.59 U100.1 ; -401.43,150.05 C121.1 C121.1@-400.5,393.48 ; C122.1@322.5,392.62 C122.1 ; 322.57,151.19 C122.1 ; C123.1 C122.1 ; 390,495.69 C102.1 604,908 837.4,1141.4 P100.2
  Bottom Layer w15: P100.1 998.06,1240.16 cw(c998.06,1202.06) 1025,1229 ccw(c1082.66,1286.66) 1082.66,1205.12 R125.1
  Bottom Layer w30: C121.1@-400.5,393.48 U101.7 ; C122.1@322.5,392.62 U102.7
VREF: C112.2 R106.1 R108.1 R109.1 R117.1 U100.4 U100.10 | length 3161.2
  Top Layer w10: v1(-491.34,-309) -139.01,-309 cw(c-139.01,-366.97) -98.02,-325.98 cw(c-127.04,-355) v1(-86,-355) cw(c-40,-355) -40,-309 150,-309 cw(c150,-336.25) 177.25,-336.25 v1(177.25,-385.25) ; v1(382.87,-385.25) 395.25,-397.63 cw(c366.88,-426) 407,-426 ccw(c425.63,-426) 412.46,-439.17 v1(438.95,-465.66)
  Bottom Layer w10: v1(-491.34,-309) -539,-309 ccw(c-539,-340.9) -570.75,-337.88 ccw(c-539,-340.9) -570.9,-340.9 -570.9,-470.27 ccw(c-549.75,-470.27) -549.75,-491.42 R117.1 -497,-587.4 ccw(c-401.4,-587.4) -469,-655 ccw(c-418.3,-604.3) -418.3,-676 -252.15,-676 cw(c-252.15,-776) -181.44,-705.29 -140,-746.73 ccw(c-109.09,-715.82) -109.09,-759.54 U100.4 ; v1(-86,-355) -86,-472 ccw(c-66.58,-472) -66.58,-491.42 C112.2 -40,-543.89 ccw(c35.11,-543.89) -18,-597 cw(c-70.73,-649.73) 3.84,-649.73 U100.10 ; R106.1 v1(177.25,-385.25) v1(382.87,-385.25) ; v1@441.02,-470.66 ccw(c433.95,-470.66) v1(438.95,-465.66) 529.75,-465.66 cw(c529.75,-504.15) 543.57,-468.23 cw(c529.75,-504.15) 552.34,-472.98 cw(c529.75,-504.15) 556.97,-476.94 cw(c541.66,-492.25) 561.87,-484.48 cw(c541.66,-492.25) 563.31,-492.25 R108.1 669.63,-521.63 cw(c669.63,-545) 693,-545 cw(c693,-546) 694,-546 694,-824 cw(c659.37,-824) 659.37,-858.63 R109.1
pads on no net: J100.2 J100.3 J100.4 J100.5 U101.2 U101.3 U101.5 U102.2 U102.3 U102.5

## Polygon pours and split planes (outlines as drawn)
NetC106_1 on Bottom Layer "Signal Layer 1-No Net" (solid, remove dead copper, pour order 0): -1273,-665.38 -1069,-665.38 -1069,-532.38 -1273,-532.38
VBAT on Bottom Layer "Signal Layer 1-No Net" (solid, remove dead copper, pour order 2): 957,356.62 957,578.62 958,579.62 968,589.62 1198,589.62 1201,589.62 1236,624.62 1245,633.62 1245,703.62 1245,707.62 1286,748.62 1290,752.62 1374,752.62 1405,752.62 1421,736.62 1429,728.62 1429,583.62 1429,503.7 1403.35,478.06 1389.92,464.62 1126,464.62 1121,464.62 1111,454.62 1103.13,446.76 1103.13,354.11
VBAT_OUT on Bottom Layer "Signal Layer 1-No Net" (solid, remove dead copper, pour order 4): -880,-700 -795,-700 -765,-670 -765,-80 -569,116 383,116 479,116 493,130 494,131 494,227 494,425 502,433 522,453 713,453 938,453 938,534 938,538.61 873,538.61 873,625 856,642 855,643 666,643 633,643 619,657 619,758 619,862 967,1210 967,1266 967,1278 948.5,1296.5 785,1133 547,895 547,678 547,651 510,614 500,604 417,604 268,604 268,278 254,264 247,257 14,257 -258,257 -299,298 -299,581 -319,601 -448,601 -456,601 -456,305 -497,264 -513,248 -683,248 -686,248 -891,43 -952,-18 -952,-663 -952,-700
DVDD_3V3 on Bottom Layer "Signal Layer 1-No Net" (solid, remove dead copper, pour order 6): -692,1284 -692,780 -586,780 -580,780 -580,1284
GND on Bottom Layer "Signal Layer 1-No Net" (solid, remove dead copper, pour order 10): 1500.8,1397.62 -1500.97,1397.63 -1960.17,-1289.55 -1976,-1362 -1919,-1399 -1862.2,-1397.64 1862.2,-1397.64 1984,-1398 1945.04,-1202
GND on Top Layer "Signal Layer 1-No Net" (solid, remove dead copper, pour order 8): 1500.8,1397.62 -1500.97,1397.63 -1960.17,-1289.55 -1976,-1362 -1919,-1399 -1862.2,-1397.64 1862.2,-1397.64 1984,-1398 1945.04,-1202

## Keep-outs
Keep-Out Layer:
  circle w3: c1862.2,-1299.21 r62.99
  circle w3: c-1862.2,-1299.21 r62.99
  circle w3: c1417.32,1299.21 r62.99
  circle w3: c-1417.32,1299.21 r62.99
  lines w3: 1960,-1289.58 1500.8,1397.62 0,1397.64 -1500.97,1397.64 -1960.17,-1289.55 ccw(c-1862.2,-1299.21) -1862.2,-1397.64 0,-1397.64 1862.2,-1397.64 ccw(c1862.2,-1299.21) 1960.16,-1289.56

## Other copper
Bottom Layer:
  rectangle net NetC101_2: -1395.5,-828.38 -1175,-760.38
  rectangle net NetC101_2: -1243,-767.38 -1175,-704.87
  rectangle net DVDD_24V: -1675,-1047.38 -1508.5,-755.38
  rectangle net NetC106_1: -1127.65,-666.38 -1116,-532.38
  rectangle net VBAT: 1280,601.62 1401,724.62
  rectangle net VBAT: 1113,481.24 1406.54,544.62
  rectangle net VBAT: 957,405.62 1103.13,420.53
  rectangle net VBAT_OUT: -438.06,580 -354,601
  rectangle net VBAT_OUT: 285.94,580 370,601
  rectangle net VBAT_OUT: 866,462 916.5,547
  rectangle net NetC118_2: -688,623 -450.5,711
  rectangle net NetC118_2: -688,704 -500,740
  rectangle net NetC119_2: 35,704 223,740
  rectangle net NetC119_2: 35,623 272.5,711
  rectangle net DVDD_3V3: -692,802 -580,848
  rectangle net DVDD_3V3: -692,1200.63 -580,1290.16
  rectangle net DVDD_3V3: -679.38,862.66 -585.64,988.8
  rectangle net VBAT_OUT: -896,-685 -804,-513
  rectangle net DVDD_3V3: -779,1190.16 -692,1290.16
  rectangle net DVDD_5V: 25.94,789 144.06,1199
  rectangle net DVDD_3V3: -692,1006.54 -620,1084
  rectangle net DVDD_5V: 3,1190.16 200,1290.16
  rectangle net VBAT_OUT: 794,1190.16 987.4,1290.16
  rectangle net NetC108_2: 406,-1.88 500,76.13
  rectangle net NetC108_2: 491.98,-75 657,76.13
  rectangle net NetC113_2: 816,-87 1116,177

## Silkscreen, mask and mechanical layers (free items; w line width, h text height)
Top Overlay:
  circle w3: c-1862.2,-1299.21 r98.43
  circle w3: c1417.32,1299.21 r98.43
  circle w3: c-1417.32,1299.21 r98.43
  circle w3: c1862.2,-1299.21 r98.43
Bottom Overlay:
  lines w3: -118.11,0 -118.11,-59.06 -59.06,-59.06 -59.06,-118.11 0,-118.11 ; -118.11,0 -118.11,59.06 -59.06,59.06 -59.06,118.11 0,118.11 ; -118.11,0 0,0 118.11,0 ; 0,-118.11 59.06,-118.11 59.06,-59.06 118.11,-59.06 118.11,0 ; 0,-118.11 0,118.11 ; 0,118.11 59.06,118.11 59.06,59.06 118.11,59.06 118.11,0
Mechanical 15:
  circle w3: c1259.84,1102.36 r98.43
  circle w3: c-1259.84,1102.36 r98.43
  circle w3: c-1259.84,-1181.1 r98.43
  circle w3: c1259.84,-1181.1 r98.43
  lines w3: -2153.51,-1485.8 -1642.2,1506.32 ; -2153.46,-1485.81 ccw(c-2095.3,-1496.06) -2095.3,-1555.12 0,-1555.12 2095.32,-1555.12 ccw(c2095.32,-1496.06) 2153.47,-1485.81 ; -2025.38,-1437.01 0,-1437.01 2025.38,-1437.01 ; -2025.31,-1437.02 -1534.19,1437 ; -1642.16,1506.32 cw(c-1584,1496.06) -1584,1555.12 0,1555.12 1584.02,1555.12 cw(c1584.02,1496.06) 1642.17,1506.32 ; -1534.25,1437.01 0,1437.01 1534.08,1437.01 ; -1285.44,-1192.03 -1270.53,-1192.03 -1270.53,-1206.94 ; -1285.44,-1191.79 -1285.44,-1181.1 -1285.44,-1170.42 -1270.53,-1170.42 -1270.53,-1155.5 -1259.84,-1155.5 -1249.16,-1155.5 -1249.16,-1170.42 -1234.24,-1170.42 -1234.24,-1181.1 -1234.24,-1191.79 -1249.16,-1191.79 -1249.16,-1206.7 -1259.84,-1206.7 -1270.53,-1206.7 ; -1285.44,1091.43 -1270.53,1091.43 -1270.53,1076.52 ; -1285.44,1091.68 -1285.44,1102.36 -1285.44,1113.05 -1270.53,1113.05 -1270.53,1127.96 -1259.84,1127.96 -1249.16,1127.96 -1249.16,1113.05 -1234.24,1113.05 -1234.24,1102.36 -1234.24,1091.68 -1249.16,1091.68 -1249.16,1076.76 -1259.84,1076.76 -1270.53,1076.76 ; 1234.24,-1192.03 1249.16,-1192.03 1249.16,-1206.94 ; 1234.24,-1191.79 1234.24,-1181.1 1234.24,-1170.42 1249.16,-1170.42 1249.16,-1155.5 1259.84,-1155.5 1270.53,-1155.5 1270.53,-1170.42 1285.44,-1170.42 1285.44,-1181.1 1285.44,-1191.79 1270.53,-1191.79 1270.53,-1206.7 1259.84,-1206.7 1249.16,-1206.7 ; 1234.24,1091.43 1249.16,1091.43 1249.16,1076.52 ; 1234.24,1091.68 1234.24,1102.36 1234.24,1113.05 1249.16,1113.05 1249.16,1127.96 1259.84,1127.96 1270.53,1127.96 1270.53,1113.05 1285.44,1113.05 1285.44,1102.36 1285.44,1091.68 1270.53,1091.68 1270.53,1076.76 1259.84,1076.76 1249.16,1076.76 ; 1534.18,1437.03 2025.31,-1437.02 ; 1642.2,1506.32 2153.51,-1485.8